# Altium PCB PCB1.PcbDoc
Units mil, origin at the board's own origin, x right, y up, seen from the top; angles counter-clockwise.
Board outline 6000 x 4000 mil, 2 copper layers (Top Layer, Bottom Layer); 57 components, 111 nets, 260 pads, 10 vias.
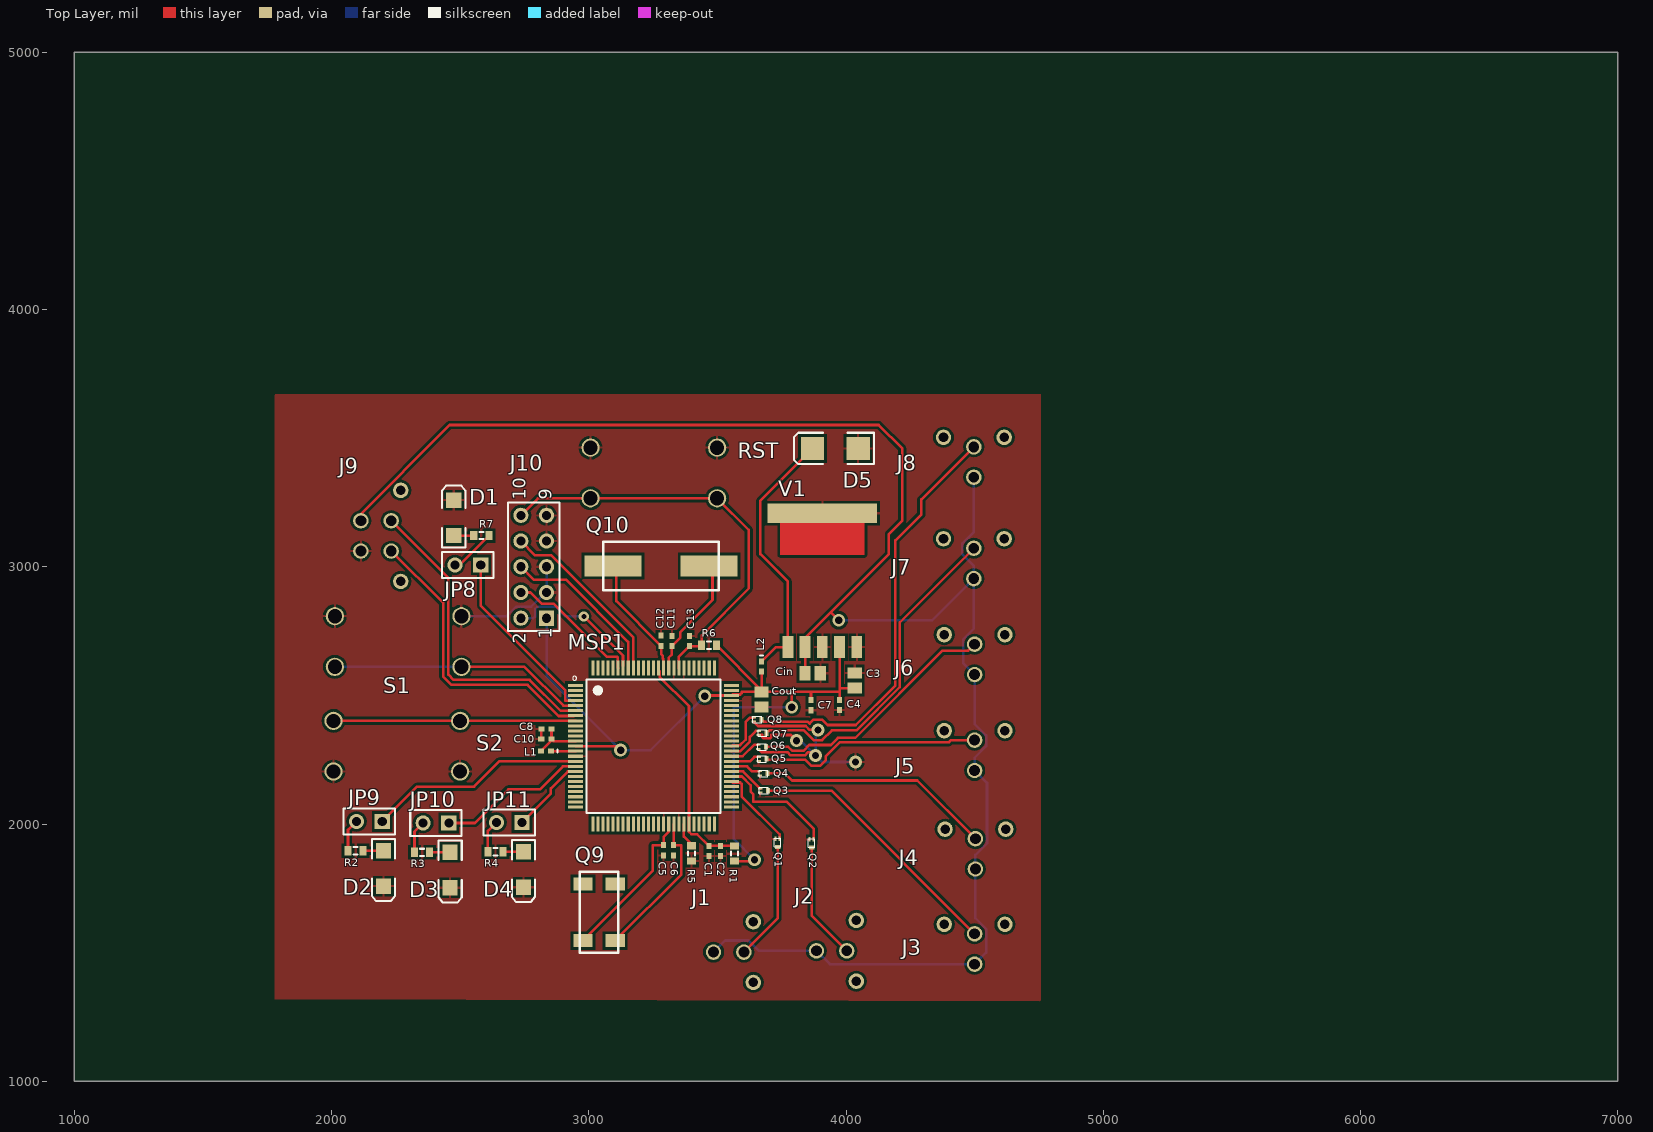
[diagram p0: Top Layer view]
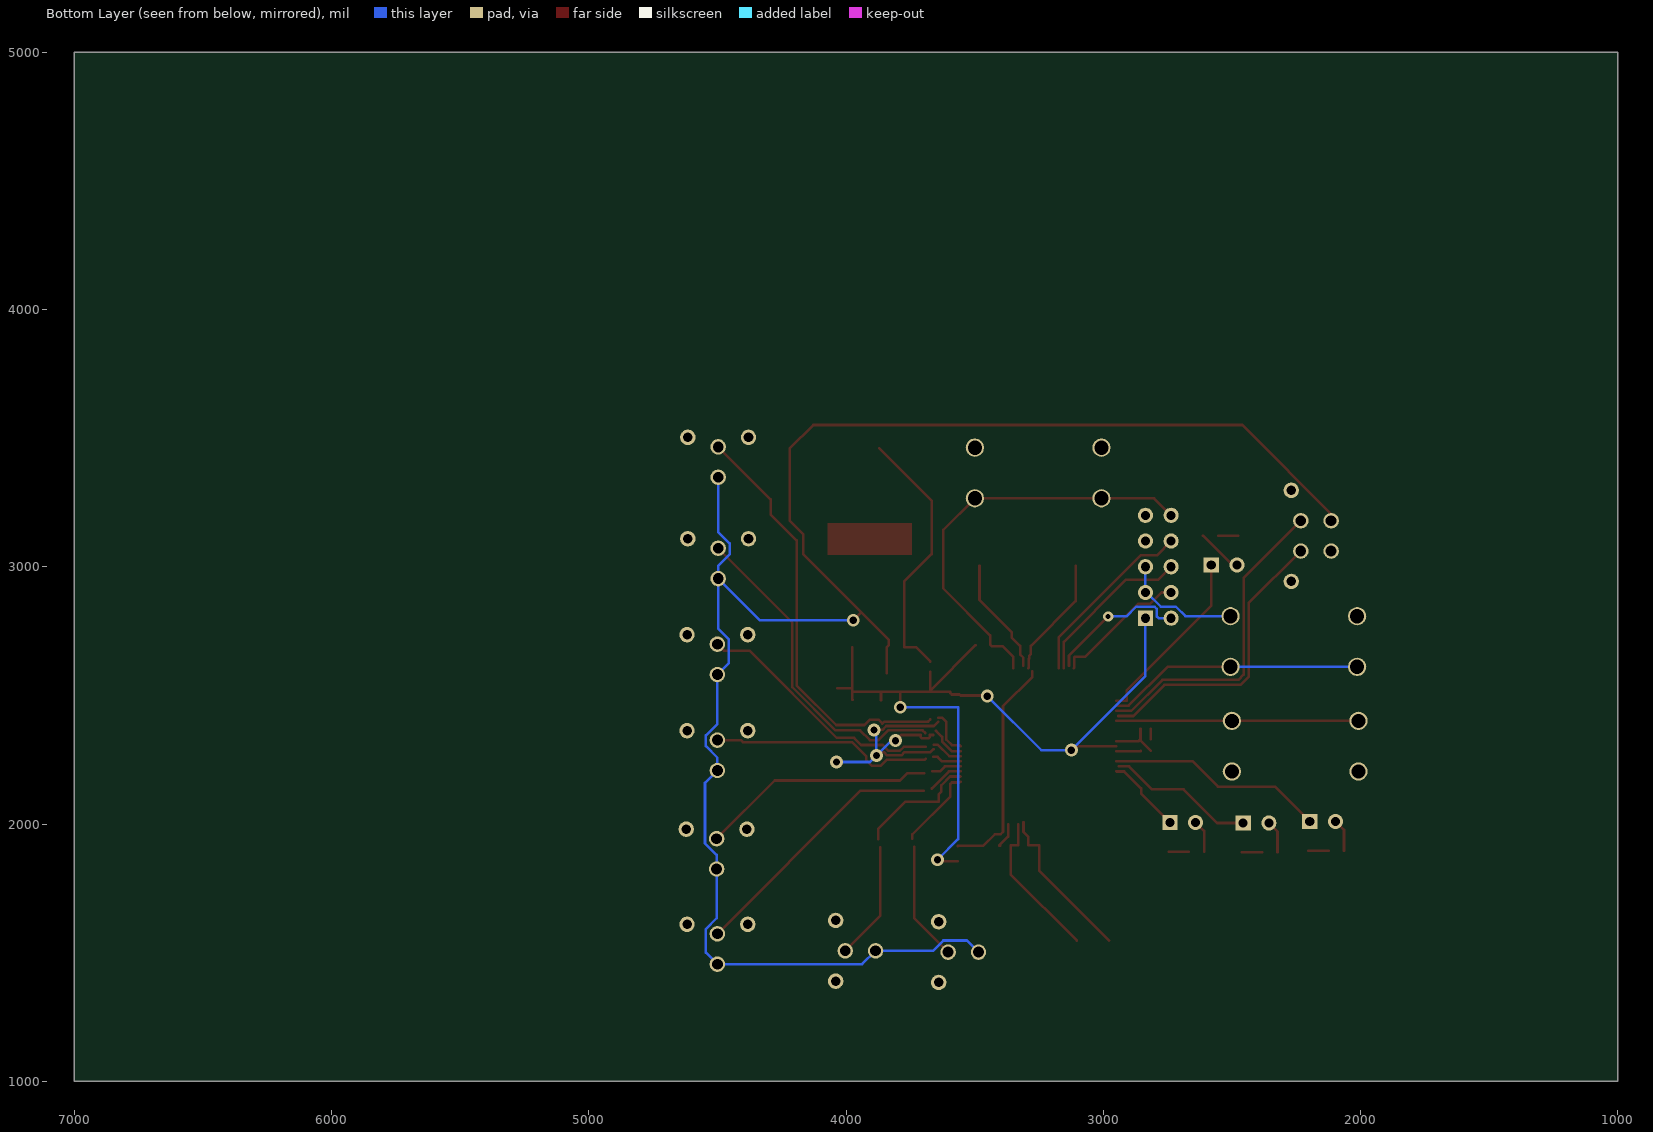
[diagram p1: Bottom Layer view, seen from below]

## Layer stack, top to bottom
Top Solder: solder mask 0.4, Solder Resist, Dk 3.5
Top Layer: signal copper 1.4
Dielectric 1: dielectric 12.6, FR-4, Dk 4.8
Bottom Layer: signal copper 1.4
Bottom Solder: solder mask 0.4, Solder Resist, Dk 3.5

## Board outline
1000,1000 7000,1000 7000,5000 1000,5000

## Design rules (kind name [scope] priority, off if disabled: settings)
Clearance [All] p1: gap=10 ignorepadtopadclearanceinfootprint=FALSE except(0: Arc-Hole Track-Hole SMDPad-Hole THPad-Hole Via-Hole Fill-Hole Poly-Hole Region-Hole Text-Hole; 5: Arc-SMDPad Track-SMDPad SMDPad-SMDPad; 7: Arc-Arc Arc-Track Track-Track)
PolygonConnect [All] p1: connectstyle=Relief reliefconductorwidth=10 reliefentries=4 polygonreliefangle="90 Angle" airgapwidth=10
RoutingVias [All] p1: holewidth=28 width=50 viastyle="Through Hole" minholewidth=28 minwidth=50 maxholewidth=28 maxwidth=50
SolderMaskExpansion [All] p1: expansion=4
Width [All] p1: maxlimit=10 minlimit=10 preferedwidth=10
30 further rules are at their usual default settings.

## Classes and differential pairs
component class Sheet2: * C13 Cin Cout D1 D2 D3 D4 D5 J2 J3 J4 J5 J6 J7 J8 J10 JP8 JP9 JP10 JP11 L2 R2 R3 R4 R6 R7 RST S1 S2 V1
component class Sheet1: C1 C2 C3 C4 C5 C6 C7 C8 C10 C11 C12 J9 L1 MSP1 Q9 Q10 R1 R5

## Components (designator, comment, footprint, x,y, rotation, side; value= is the part's Value field where it differs from the comment)
C1 "Cap Semi" 0402 3467,1895 r90 top value=100nF
C2 "Cap Semi" 0402 3512,1895 r90 top value=100nF
C3 "Cap Pol3" C0805 4034,2558 r90 top value=10uF
C4 "Cap Semi" 0402 3974,2463 r90 top value=100nF
C5 "Cap Semi" 0402 3291,1898 r90 top value=22pF
C6 "Cap Semi" 0402 3330,1898 r90 top value=22pF
C7 "Cap Semi" 0402 3864,2462 r90 top value=100nF
C8 "Cap Semi" 0402 2835.31,2370 r0 top value=100nF
C10 "Cap Semi" 0402 2835,2330 r0 top value=4.7uF
C11 "Cap Semi" 0402 3323,2711.69 r270 top value=22pF
C12 "Cap Semi" 0402 3281,2712.32 r270 top value=22pF
C13 "Cap Semi" 0402 3391,2711 r270 top value=1nF
Cin "Cap Pol3" C0805 3870.53,2586 r0 top value=220uF
Cout "Cap Pol3" C0805 3672,2484 r270 top value=120uF
D1 "LED2" 3.2X1.6X1.1 2475,3189.9 r90 top
D2 "LED2" 3.2X1.6X1.1 2202,1827.1 r270 top
D3 "LED2" 3.2X1.6X1.1 2461,1821.1 r270 top
D4 "LED2" 3.2X1.6X1.1 2746,1823.1 r270 top
D5 "Diode B340B" SMB 3958.58,3460 r180 top
J1 "MOLEX 2CKT Header" "MOLEX 2CKT Header" 3603,1502 r270 top
J2 "MOLEX 2CKT Header" "MOLEX 2CKT Header" 4003,1507 r270 top
J3 "MOLEX 2CKT Header" "MOLEX 2CKT Header" 4500,1573 r0 top
J4 "MOLEX 2CKT Header" "MOLEX 2CKT Header" 4503,1943 r0 top
J5 "MOLEX 2CKT Header" "MOLEX 2CKT Header" 4500,2326 r0 top
J6 "MOLEX 2CKT Header" "MOLEX 2CKT Header" 4500,2699 r0 top
J7 "MOLEX 2CKT Header" "MOLEX 2CKT Header" 4497,3072 r0 top
J8 "MOLEX 2CKT Header" "MOLEX 2CKT Header" 4497,3466 r0 top
J9 "MOLEX 4CKT Header" "MOLEX 4CKT Header" 2232,3179 r270 top
J10 "Header 5X2" HDR2X5 2836,2800 r90 top
JP8 "Jumper" HDR1X2 2580,3007 r180 top
JP9 "Jumper" HDR1X2 2197,2010 r180 top
JP10 "Jumper" HDR1X2 2456,2004 r180 top
JP11 "Jumper" HDR1X2 2741,2006 r180 top
L1 "Inductor" 0402-A 2834.32,2284 r180 top value=4.7uH
L2 "Inductor" 0402-A 3672,2612 r270 top value=68uH
MSP1 "MSP432P401R" MSP432P401R 3251.85,2302.8 r0 top
Q1 "MOSFET-N" SiUD41ED 3721.1,1944.85 r270 top
Q2 "MOSFET-N" SiUD41ED 3853.3,1942.85 r270 top
Q3 "MOSFET-N" SiUD41ED 3663.5,2117.2 r0 top
Q4 "MOSFET-N" SiUD41ED 3662.15,2184.1 r0 top
Q5 "MOSFET-N" SiUD41ED 3657.15,2240.1 r0 top
Q6 "MOSFET-N" SiUD41ED 3656.15,2287.1 r0 top
Q7 "MOSFET-N" SiUD41ED 3658.15,2341.1 r0 top
Q8 "MOSFET-N" SiUD41ED 3638.15,2393.1 r0 top
Q9 "Crystal Oscillator" 4-SOJ 3040,1657 r90 top
Q10 "Crystal Oscillator" HC-49/US 3281,3003 r0 top
R1 "Res3" J1-0603 3566,1885 r270 top value=0
R2 "Res3" J1-0603 2093.47,1896 r0 top value=110
R3 "Res3" J1-0603 2352,1890 r0 top value=16
R4 "Res3" J1-0603 2637.47,1892 r0 top value=24
R5 "Res3" J1-0603 3400,1886 r270 top value=91K
R6 "Res3" J1-0603 3467,2695 r0 top value=47k
R7 "Res3" J1-0603 2582.53,3121 r180 top value=470
RST "Push Button" "Push Button" 3499.13,3463 r180 top
S1 "Push Button" "Push Button" 2505,2807.85 r180 top
S2 "Push Button" "Push Button" 2007.87,2204.15 r0 top
V1 "LM2595S-3.3/NOPB-ND" LM2595S-3.3/NOPB-ND 3908,3245.5 r270 top

## Footprints (in the part's own frame and the unit in brackets; to place one, negate y for a bottom-side part, rotate by r counter-clockwise, add the part's x,y. Pads: shape width x height; smd on the part's side, far side on the other; paste and mask are expansions set on the pad)
3.2X1.6X1.1 [mm] "SMT LED; 2 Flat Leads"
  rect 1.5x1.5 smd: 1(-1.75,0) 2(1.75,0)
  silkscreen extent -2.9,-1.15 3.2,1.15
4-SOJ [mil]
  rect 50x75 smd: 1(-110,-62.5) 2(110,-62.5) 3(110,62.5) 4(-110,62.5)
  silkscreen extent -158,-75 158,75
0402 [mm] "Chip Capacitor, Body 1.0x0.5mm, IPC High Density"
  rect 0.6x0.5 smd: 1(-0.5,0) 2(0.5,0)
  body extent -0.55,-0.3 0.55,0.3, height 1.3
0402-A [mm] "Chip Inductor, Body 1.0x0.5mm, IPC High Density"
  rect 0.6x0.5 smd: 1(-0.5,0) 2(0.5,0)
  silkscreen extent -1.1,-0.15 -1.1,0.15, body extent -0.55,-0.3 0.55,0.3, height 0.55
C0805 [mm] "Chip Capacitor, Body 2.0x1.3mm, IPC High Density"
  rect 1.1x1.4 smd: 1(-0.75,0) 2(0.75,0)
  body extent -1.1,-0.72 1.1,0.72, height 1.4
HC-49/US [mil]
  rect 222x83 smd: 1(-187,0) 2(187,0)
  silkscreen extent -225,-95 225,95
HDR1X2 [mm] "Connector; Header; 2 Position"
  rect 1.5x1.5 hole 0.9: 1(0,0)
  round 1.5 hole 0.9: 2(2.54,0)
  silkscreen extent -1.27,-1.27 3.81,1.27
HDR2X5 [mm] "Connector; Header; 5x2 Position"
  rect 1.5x1.5 hole 0.9: 1(0,0)
  round 1.5 hole 0.9: 2(0,2.54) 3(2.54,0) 4(2.54,2.54) 5(5.08,0) 6(5.08,2.54) 7(7.62,0) 8(7.62,2.54) 9(10.16,0) 10(10.16,2.54)
  silkscreen extent -1.27,-1.27 11.43,3.81
J1-0603 [mm] "Chip Resistor, Body 1.6x0.8mm, IPC High Density"
  rect 0.7x0.9 smd: 1(-0.75,0) 2(0.75,0)
  silkscreen extent -0.2,-0.35 0.2,0.35, body extent -0.85,-0.48 0.85,0.48, height 0.9
LM2595S-3.3/NOPB-ND [mil]
  rect 85x42 smd: 1(558,-134) 2(558,-67) 3(558,0) 4(558,67) 5(558,134)
  rect 75x425 smd: 3(37.5,0)
  Top Layer region: 75,-164 200,-164 200,164 75,164
  Top Layer region: 75,-164 200,-164 200,164 75,164
"MOLEX 2CKT Header" [mil]
  round 60 hole 42: 1(0,-118) 2(0,0)
  round 60 hole 37: 20(118,37) 21(-118,37)
  body extent -141,-214 141,131, height 395
"MOLEX 4CKT Header" [mil]
  round 60 hole 42: 1(118,-118) 2(0,-118) 3(118,0) 4(0,0)
  round 60 hole 37: 19(-118,37) 20(236,37)
  body extent -141,-214 259,131, height 395
MSP432P401R [mm]
  rect 1.5x0.3 smd: 1(-7.7,6) 2(-7.7,5.5) 3(-7.7,5) 4(-7.7,4.5) 5(-7.7,4) 6(-7.7,3.5) 7(-7.7,3) 8(-7.7,2.5) 9(-7.7,2) 10(-7.7,1.5) 11(-7.7,1) 12(-7.7,0.5) 13(-7.7,0) 14(-7.7,-0.5) 15(-7.7,-1) 16(-7.7,-1.5) 17(-7.7,-2) 18(-7.7,-2.5) 19(-7.7,-3) 20(-7.7,-3.5) 21(-7.7,-4) 22(-7.7,-4.5) 23(-7.7,-5) 24(-7.7,-5.5) 25(-7.7,-6) 51(7.7,-6) 52(7.7,-5.5) 53(7.7,-5) 54(7.7,-4.5) 55(7.7,-4) 56(7.7,-3.5) 57(7.7,-3) 58(7.7,-2.5) 59(7.7,-2) 60(7.7,-1.5) 61(7.7,-1) 62(7.7,-0.5) 63(7.7,0) 64(7.7,0.5) 65(7.7,1) 66(7.7,1.5) 67(7.7,2) 68(7.7,2.5) 69(7.7,3) 70(7.7,3.5) 71(7.7,4) 72(7.7,4.5) 73(7.7,5) 74(7.7,5.5) 75(7.7,6)
  rect 0.3x1.5 smd: 26(-6,-7.7) 27(-5.5,-7.7) 28(-5,-7.7) 29(-4.5,-7.7) 30(-4,-7.7) 31(-3.5,-7.7) 32(-3,-7.7) 33(-2.5,-7.7) 34(-2,-7.7) 35(-1.5,-7.7) 36(-1,-7.7) 37(-0.5,-7.7) 38(0,-7.7) 39(0.5,-7.7) 40(1,-7.7) 41(1.5,-7.7) 42(2,-7.7) 43(2.5,-7.7) 44(3,-7.7) 45(3.5,-7.7) 46(4,-7.7) 47(4.5,-7.7) 48(5,-7.7) 49(5.5,-7.7) 50(6,-7.7) 76(6,7.7) 77(5.5,7.7) 78(5,7.7) 79(4.5,7.7) 80(4,7.7) 81(3.5,7.7) 82(3,7.7) 83(2.5,7.7) 84(2,7.7) 85(1.5,7.7) 86(1,7.7) 87(0.5,7.7) 88(0,7.7) 89(-0.5,7.7) 90(-1,7.7) 91(-1.5,7.7) 92(-2,7.7) 93(-2.5,7.7) 94(-3,7.7) 95(-3.5,7.7) 96(-4,7.7) 97(-4.5,7.7) 98(-5,7.7) 99(-5.5,7.7) 100(-6,7.7)
  silkscreen extent -8,-6.6 6.6,6.9
"Push Button" [mm]
  round 1.8 hole 1.4: 1(12.5,0) 2(0,0) 3(12.5,5) 4(0,5)
SiUD41ED [mil] "N-Channel MOSFET"
  rect 17.5x7.1 smd mask+1: 1(2.85,20.7) 2(2.85,4.9)
  rect 15.8x21.7 smd mask+1: 3(33.5,12.8)
  silkscreen extent 0,0 34,26
SMB [mm] "DO-214-AA/SMB; 2 C-Bend Leads; Body 5.3 x 3.6 mm, inc. leads (LxW)"
  rect 2.3x2.3 smd: 1(-2.25,0) 2(2.25,0)
  silkscreen extent -3.8,-1.55 4.1,1.55

## Part data
C1 C2 C4 C5 C6 C7 C8 C10 C11 C12 C13: "Capacitor (Semiconductor SIM Model)", LatestRevisionDate=29-May-2009, LatestRevisionNote="IPC-7351 Footprint Added.", PackageDescription="Chip Capacitor", PackageReference=C1206, Published=8-Jun-2000, Publisher="Altium Limited"
C3 Cin Cout: "Polarized Capacitor (Surface Mount)", LatestRevisionDate=29-May-2009, LatestRevisionNote="IPC-7351 Footprint Added.", PackageDescription="Chip Capacitor", PackageReference=C0805, Published=8-Jun-2000, Publisher="Altium Limited"
D1 D2 D3 D4: "Typical RED, GREEN, YELLOW, AMBER GaAs LED", LatestRevisionDate=17-Jul-2002, LatestRevisionNote="Re-released for DXP Platform.", PackageDescription="SM LED; 2 Flat Leads", PackageReference=3.2X1.6X1.1, PackageVersion=Feb-2002, Published=8-Jun-2000, Publisher="Altium Limited"
D5: library part Diode, "Default Diode", Code_JEDEC=DO-214-AB, LatestRevisionDate=17-Jul-2002, LatestRevisionNote="Re-released for DXP Platform.", PackageDescription="DO-214-AB/SMC; 2 C-Bend Leads; Body 7.9 x 5.9 mm, inc. leads (LxW)", PackageReference=SMC, PackageVersion=Sep-1996, Published=8-Jun-2000, Publisher="Altium Limited"
J10: "Header, 5-Pin, Dual row", LatestRevisionDate=17-Jul-2002, LatestRevisionNote="Re-released for DXP Platform.", Publisher="Altium Limited"
JP8 JP9 JP10 JP11: "Jumper Wire", LatestRevisionDate=17-Jul-2002, LatestRevisionNote="Re-released for DXP Platform.", PackageDescription="Radial Cap, Thru-Hole; 2 Leads; 0.2 in Pin Spacing", PackageReference=RAD-0.2, Published=24-Mar-1999, Publisher="Altium Limited"
Q1 Q2 Q3 Q4 Q5 Q6 Q7 Q8: library part SiUD41ED
R1 R2 R3 R4 R5 R6 R7: "Resistor", LatestRevisionDate=29-May-2009, LatestRevisionNote="IPC-7351 Footprint Added.", PackageDescription="Chip Resistor", PackageReference=J1-0603, Published=8-Jun-2000, Publisher="Altium Limited"
L1 L2: Code_IEC=1005, Code_JEITA=0402, LatestRevisionDate=29-May-2009, LatestRevisionNote="IPC-7351 Footprint Added.", PackageDescription="Chip Inductor", PackageReference=0402-A, Published=8-Jun-2000, Publisher="Altium Limited"

## Via types
v1: diameter 50, hole 28, Top Layer to Bottom Layer, 9 vias
v2: diameter 40, hole 20, Top Layer to Bottom Layer, 1 vias

## Nets (pads, with @x,y where several pads share a name; then routed paths per layer and width w, separated by ;. In a path a pad name is that pad's centre, name@x,y a point inside that pad or via, vN(x,y) a via of type N, cw(c..) or ccw(c..) an arc to the next point about the centre after c; other vN are vias at no path point)
+3V3: C3.1 C4.2 C7.2 Cout.1 J10.1 L2.2 MSP1.13 MSP1.73 R1.2 R6.2 V1.4 | length 3376.5
  Top Layer w10: MSP1.13 3108.2,2302.8 v1(3124,2287) ; v1(3451,2497) 3453.65,2499.65 MSP1.73 3558.78,2503.43 3588.67,2503.43 3594.53,2509.28 3594.53,2513.53 Cout.1 ; R6.2 Cout.1@3672,2519.53 ; R1.2 3638.47,1855.47 v1(3644,1861) ; L2.2 Cout.1@3672,2519.53 ; v1(3789,2454) 3789,2512.53 3790,2513.53 ; C7.2 3864,2512.53 3863,2513.53 ; C4.2 3975,2483.69 3975,2513.53 ; V1.4 3975,2529 ; C3.1 3975.53,2528.47 3975,2529 ; Cout.1 Cout.1@3672,2519.53 ; Cout.1 3790,2513.53 ; 3790,2513.53 3863,2513.53 ; 3863,2513.53 3975,2513.53 ; 3975,2513.53 3975,2529
  Bottom Layer w10: J10.1 2836,2575 v1(3124,2287) 3241,2287 v1(3451,2497) ; v1(3644,1861) 3564,1941 3564,2454 v1(3789,2454)
DCOR: MSP1.44 R5.1 | length 103.6
  Top Layer w10: MSP1.44@3369.65,1999.65 3369.65,1950.79 3404.51,1915.93 3399.6,1915.93 R5.1
GND: C1.1 C2.1 C3.2 C4.1 C5.1 C6.1 C7.1 C8.1 C10.1 C11.1 C12.1 C13.1 Cin.2 Cout.2 D1.2 D2.2 D3.2 D4.2 D5.1 J9.1 J10.3 J10.5 J10.7 J10.9 MSP1.15 MSP1.40 MSP1.43 MSP1.72 MSP1.82 MSP1.84 Q1.2 Q2.2 Q3.2 Q4.2 Q5.2 Q6.2 Q7.2 Q8.2 R5.2 RST.1 RST.2 S1.1 S1.2 S2.1 S2.2 V1.3 V1.5 | length 1557.5
  Top Layer w10: C10.1 2815.32,2369.69 C8.1 ; Q8.2@3641,2396.8 3642.2,2396.8 3658,2381 3843.47,2381 3858.47,2366 v1(3891,2366) ; Q6.2@3659,2290.8 3660.2,2290.8 3672,2279 3772.39,2279 3784.39,2267 3841.04,2267 3853.04,2279 3869,2279 v1(3882,2266) ; Q7.2 3673.75,2346 3673.75,2338.91 3679.61,2333.05 3703.69,2333.05 3709.55,2338.91 3709.55,2346 3786,2346 v1(3808,2324)
  Bottom Layer w10: S1.2 2680.88,2807.85 2717.56,2844.53 2776.22,2844.53 2831.69,2900 J10.3 J10.5 ; v1(3808,2324) 3824,2324 v1(3882,2266) ; v1(3891,2366) 3882,2357 v1(3882,2266) ; v1(4037,2241) 3907,2241 v1(3882,2266)
NetC1_2: C1.2 C2.2 MSP1.45 MSP1.87 R1.1 | length 869.8
  Top Layer w10: MSP1.87@3275.32,2593 3275.32,2572.28 3389.65,2457.94 MSP1.45 3389.65,1984.75 3389.71,1984.68 3389.71,1969.69 3399.28,1960.12 3421.57,1960.12 C1.2 C2.2 3565.84,1914.69 R1.1
NetC5_2: C5.2 MSP1.41 Q9.4 | length 622.7
  Top Layer w10: Q9.4 3249,1818.5 3249,1917.69 C5.2 3291,1949.85 3310,1968.85 MSP1.41@3310,2007.34
NetC6_2: C6.2 MSP1.42 Q9.1 | length 589.6
  Top Layer w10: Q9.1 3360,1804.5 3360,1917.69 C6.2 3330,1999.06 MSP1.42
NetC11_2: C11.2 MSP1.85 Q10.2 | length 459.9
  Top Layer w10: MSP1.85@3310.91,2614.54 3310.91,2646.91 3323,2659 C11.2 3356,2725 3356,2746 3481,2871 Q10.2@3481,3004
NetC12_2: C12.2 MSP1.86 Q10.1 | length 474.4
  Top Layer w10: Q10.1@3107,3004 3107,2866.63 C12.2 3281,2661.17 3287.44,2654.73 3287.44,2643.47 3290,2640.92 3290,2607.17 MSP1.86
NetD1_1: D1.1 R7.2 | length 78
  Top Layer w10: D1.1 R7.2
NetD2_1: D2.1 R2.2 | length 79
  Top Layer w10: R2.2 D2.1
NetD3_1: D3.1 R3.2 | length 79.5
  Top Layer w10: R3.2 D3.1
NetD4_1: D4.1 R4.2 | length 79
  Top Layer w10: R4.2 D4.1
NetD5_2: D5.2 L2.1 V1.1 | length 1026
  Top Layer w10: L2.1 3727.82,2687.5 V1.1 3774,2942 3667,3049 3667,3257 D5.2
NetJ1_2: J1.2 Q1.3 | length 463.6
  Top Layer w10: J1.2 3733.9,1632.9 Q1.3
NetJ2_2: J2.2 Q2.3 | length 459.1
  Top Layer w10: Q2.3 3866.1,1643.9 J2.2
NetJ3_2: J3.2 Q3.3 | length 1033.7
  Top Layer w10: Q3.3 3943,2130 J3.2
NetJ4_2: J4.2 Q4.3 | length 912.5
  Top Layer w10: Q4.3 3762.53,2196.9 3790.43,2169 4277,2169 J4.2
NetJ5_2: J5.2 Q5.3 | length 870.4
  Top Layer w10: Q5.3 3694.12,2249.43 3842,2249.43 3865.43,2226 3898.57,2226 3922,2249.43 3922,2264 3976,2318 4400.64,2318 4408.64,2326 J5.2
NetJ6_2: J6.2 Q6.3 | length 988.8
  Top Layer w10: Q6.3 3775.53,2299.9 3791.43,2284 3834,2284 3857,2307 3940.96,2307 3968.96,2335 4036,2335 4375,2674 4475,2674 J6.2
NetJ7_2: J7.2 Q7.3 | length 1281.9
  Top Layer w10: Q7.3 3701.75,2364 3836.43,2364 3874.43,2326 3907.57,2326 3945.57,2364 4040.96,2364 4209,2532.04 4209,2784 J7.2
NetJ8_2: J8.2 Q8.3 | length 1659.8
  Top Layer w10: Q8.3@3671.65,2407 3680.65,2398 3850.51,2398 3858.47,2390.04 3874.43,2406 3907.57,2406 3928.57,2385 4037.92,2385 4192,2539.08 4192,3103 4293,3204 4293,3262 J8.2
NetJ10_4: J10.4 MSP1.95 | length 523.1
  Top Layer w10: J10.4 2773.03,2900 2817.56,2855.47 2864.53,2855.47 3070,2650 3109.72,2650 3113,2646.72 3113,2607 MSP1.95
NetJP8_2: JP8.2 R7.1 | length 179.3
  Top Layer w10: JP8.2 2498.06,3007 R7.1
NetJP9_2: JP9.2 R2.1 | length 127.7
  Top Layer w10: R2.1 2063.94,1976.94 JP9.2
NetJP10_2: JP10.2 R3.1 | length 127.9
  Top Layer w10: R3.1 2322.47,1970.47 JP10.2
NetJP11_2: JP11.2 R4.1 | length 127.7
  Top Layer w10: R4.1 2607.94,1972.94 JP11.2
P1.0_LED1: JP8.1 MSP1.4 | length 702.9
  Top Layer w10: JP8.1 2580,2848.66 2909.17,2519.49 2909.17,2479.96 MSP1.4
P1.1_BUTTON1: MSP1.5 S1.3 S1.4 | length 998.4
  Top Layer w10: S1.4 2749.85,2611 2900.89,2459.96 MSP1.5@2948.7,2459.96
  Bottom Layer w10: S1.3 S1.4
P1.2_BCLUART_RXD: J9.4 MSP1.6 | length 1243.1
  Top Layer w10: J9.4 2454.57,2956.43 2454.57,2580.43 2474.43,2560.57 2770.43,2560.57 2891.04,2439.96 MSP1.6@2948.7,2439.96
P1.3_BCLUART_TXD: J9.3 MSP1.7 | length 1142.8
  Top Layer w10: J9.3 2434.57,2858.43 2434.57,2572.15 2466.15,2540.57 2762.15,2540.57 2882.76,2419.96 MSP1.7@2941.54,2419.96
P1.4_BUTTON2: MSP1.8 S2.3 S2.4 | length 940.9
  Top Layer w10: S2.4 S2.3 2500.22,2401.22 MSP1.8
P1.5_SPICLK_J1.7: MSP1.9
P1.6_SPIMOSI_J2.15: MSP1.10
P1.7_SPIMISO_J2.14: MSP1.11
P2.0_RGBLED_RED: JP9.1 MSP1.16 | length 848.8
  Top Layer w10: JP9.1 2332,2145 2554,2145 2653.06,2244.06 2948.39,2244.06 MSP1.16
P2.0_RGBLEQ_BLUE: JP11.1 MSP1.18 | length 301.9
  Top Layer w10: JP11.1 2853,2118 2853,2138.56 2918.44,2204 2934.04,2204 2934.09,2204.06 2948.39,2204.06 MSP1.18
P2.0_RGBLEQ_GREEN: JP10.1 MSP1.17 | length 575.3
  Top Layer w10: JP10.1 2556.89,2004 2687.89,2135 2810,2135 2899.06,2224.06 MSP1.17@2940.1,2224.06
P2.3_IO_J4.34: MSP1.19
P2.4_PWM_J4.38: MSP1.20
P2.5_PWM_J2.19: MSP1.21
P2.6_PWM_J4.39: MSP1.22
P2.7_PWM_J4.40: MSP1.23
P3.0_IO_J2.18: MSP1.32
P3.1: MSP1.33
P3.2_URXD_J1.3: MSP1.34
P3.3_UTXD_J1.4: MSP1.35
P3.4: MSP1.36
P3.5_IO_J4.32: MSP1.37
P3.6_IO_J2.11: MSP1.38
P3.7_IO_J4.31: MSP1.39
P4.0_A13_J3.24: MSP1.56 Q1.1 | length 317.9
  Top Layer w10: MSP1.56 3558.78,2161.22 3588.67,2161.22 3594.53,2155.36 3594.53,2107.43 3741.8,1960.16 Q1.1
P4.1_IO_J1.5: MSP1.57 Q2.1 | length 476.7
  Top Layer w10: MSP1.57 3595.52,2184.69 3629.5,2150.7 3629.5,2125.5 3639,2116 3639,2087 3769,2087 3874,1982 Q2.1
P4.2_A11_J3.25: MSP1.58 Q3.1 | length 138.9
  Top Layer w10: MSP1.58 3599.88,2204.37 Q3.1
P4.3_A10_J1.6: MSP1.59 Q4.1 | length 118
  Top Layer w10: MSP1.59 3615.94,2224.06 3635.2,2204.8 Q4.1
P4.4_A9_J3.26: MSP1.60 Q5.1 | length 112.1
  Top Layer w10: MSP1.60 3626.44,2243.74 3643.5,2260.8 Q5.1
P4.5_A8_J3.27: MSP1.61 Q6.1 | length 122.4
  Top Layer w10: MSP1.61 3598.13,2263.43 3642.5,2307.8 Q6.1
P4.6_IO_J1.8: MSP1.62 Q7.1 | length 138.3
  Top Layer w10: MSP1.62 3589.25,2283.11 3626.6,2320.46 3626.6,2338.21 3650.25,2361.86
P4.7_A6_J3.28: MSP1.63 Q8.1 | length 172.2
  Top Layer w10: MSP1.63 3558.78,2306.57 3588.67,2306.57 3609.6,2327.51 3609.6,2396.15 3627.25,2413.8 Q8.1
P5.0_IO_J2.13: MSP1.64
P5.1_IO_J4.33: MSP1.65
P5.2_IO_J2.12: MSP1.66
P5.3: MSP1.67
P5.4_IO_J3.29: MSP1.68
P5.5_IO_J3.30: MSP1.69
P5.6_PWM_J4.37: MSP1.70
P5.7_IO_J2.17: MSP1.71
P6.0_A15_J1.2: MSP1.54
P6.1_A14_J3.23: MSP1.55
P6.2: MSP1.76
P6.3: MSP1.77
P6.4_I2CSDA_J1.10: MSP1.78
P6.5_I2CSCL_J1.9: MSP1.79
P6.6_CAPTURE_J4.36: MSP1.80
P6.7_CAPTURE_J4.35: MSP1.81
P7.0: MSP1.88
P7.1: MSP1.89
P7.2: MSP1.90
P7.3: MSP1.91
P7.4: MSP1.26
P7.5: MSP1.27
P7.6: MSP1.28
P7.7: MSP1.29
P8.0: MSP1.30
P8.1: MSP1.31
P8.2: MSP1.46
P8.3: MSP1.47
P8.4: MSP1.48
P8.5: MSP1.49
P8.6: MSP1.50
P8.7: MSP1.51
P9.0: MSP1.52
P9.1: MSP1.53
P9.2: MSP1.74
P9.3: MSP1.75
P9.4: MSP1.96
P9.5: MSP1.97
P9.6: MSP1.98
P9.7: MSP1.99
P10.0: MSP1.100
P10.1: MSP1.1
P10.2: MSP1.2
P10.3: MSP1.3
P10.4: MSP1.24
P10.5: MSP1.25
RST: C13.2 J10.10 MSP1.83 R6.1 RST.3 RST.4 | length 1639.2
  Top Layer w10: J10.10 2802.15,3266.15 RST.3 RST.4 3622,3143.28 3622,2916 3439.47,2733.47 3439.47,2697 R6.1 3433.79,2691.31 C13.2 3350.28,2650.59 MSP1.83
TDI: J10.8 MSP1.92 | length 712
  Top Layer w10: J10.8 2791.47,3044.53 2854.44,3044.53 3173.11,2725.86 MSP1.92
TDO_SWO: J10.6 MSP1.93 | length 640.1
  Top Layer w10: J10.6 2786,2950 2911,2950 3153.11,2707.89 MSP1.93@3153.11,2605.94
TMS_SWDIO: J10.2 MSP1.94 | length 550.9
  Top Layer w10: v2(2981,2807) 3133.11,2654.89 3133.11,2615.28 MSP1.94@3133,2615.28
  Bottom Layer w10: J10.2 2784.83,2800 2791.47,2806.64 2791.47,2835.74 2800.26,2844.53 2871.74,2844.53 2909.27,2807 v2(2981,2807)
VCC: Cin.1 J1.1 J2.1 J3.1 J4.1 J5.1 J6.1 J7.1 J8.1 J9.2 V1.2 | length 7146.1
  Top Layer w10: J9.2 2100.68,3192.32 2459.36,3551 4127,3551 4219,3459 4219,3179 4167,3127 4167,3050 3941,2824 ; Cin.1 V1.2 3834,2694.5 3834,2717 3941,2824 ; v1(3972,2792) 3941,2823 3941,2824
  Bottom Layer w10: J1.1 3530,1547 3621.64,1547 3661.64,1507 J2.1 3937,1455 J3.1 4545,1500 4545,1591.64 4503,1633.64 J4.1 4503,1879.36 4548,1924.36 4548,2160 J5.1 4500,2257.5 4545,2302.5 4545,2344.64 4500,2389.64 J6.1 4455,2626 4455,2717.64 4497,2759.64 J7.1 ; v1(3972,2792) 4335,2792 J7.1 ; J8.1 4497,3135.64 4452,3090.64 4452,3048.5 4497,3003.5 J7.1
VCORE: C8.2 C10.2 L1.2 MSP1.12 | length 199.9
  Top Layer w10: L1.2 2854.69,2324.06 C10.2 ; C8.2 2855,2330.32 C10.2 ; MSP1.12 2862.2,2322.48 C10.2
VSW: L1.1 MSP1.14 | length 95.1
  Top Layer w10: L1.1 2854.89,2283.11 MSP1.14
pads on no net: J1.20 J1.21 J2.20 J2.21 J3.20 J3.21 J4.20 J4.21 J5.20 J5.21 J6.20 J6.21 J7.20 J7.21 J8.20 J8.21 J9.19 J9.20 Q9.2 Q9.3

## Polygon pours and split planes (outlines as drawn)
GND on Top Layer "Top Layer-No Net" (solid, pour order 2): 1779,1319 1779,3666 1775,3670 4757,3670 4757,1315 4753,1311

## Text inside footprints (layer, text, board x,y; h text height)
J10: Top Overlay "2" at 2756,2700 h50 r90; Top Overlay "1" at 2856,2720 h50 r90; Top Overlay "9" at 2856,3260 h50 r90; Top Overlay "10" at 2756,3260 h50 r90